# Altium PCB STM32_PCB.PcbDoc (part 3 of 3)
Units mm, origin at the board's own origin, x right, y up, seen from the top; angles counter-clockwise.
Board outline 112.45 x 84.2 mm, 4 copper layers (Top Layer, Int1 (GND), Int2 (PWR), Bottom Layer), stack 1.479 mm thick; 174 components, 200 nets, 660 pads, 398 vias.
Unrouted connection lines stored in the file: 12.
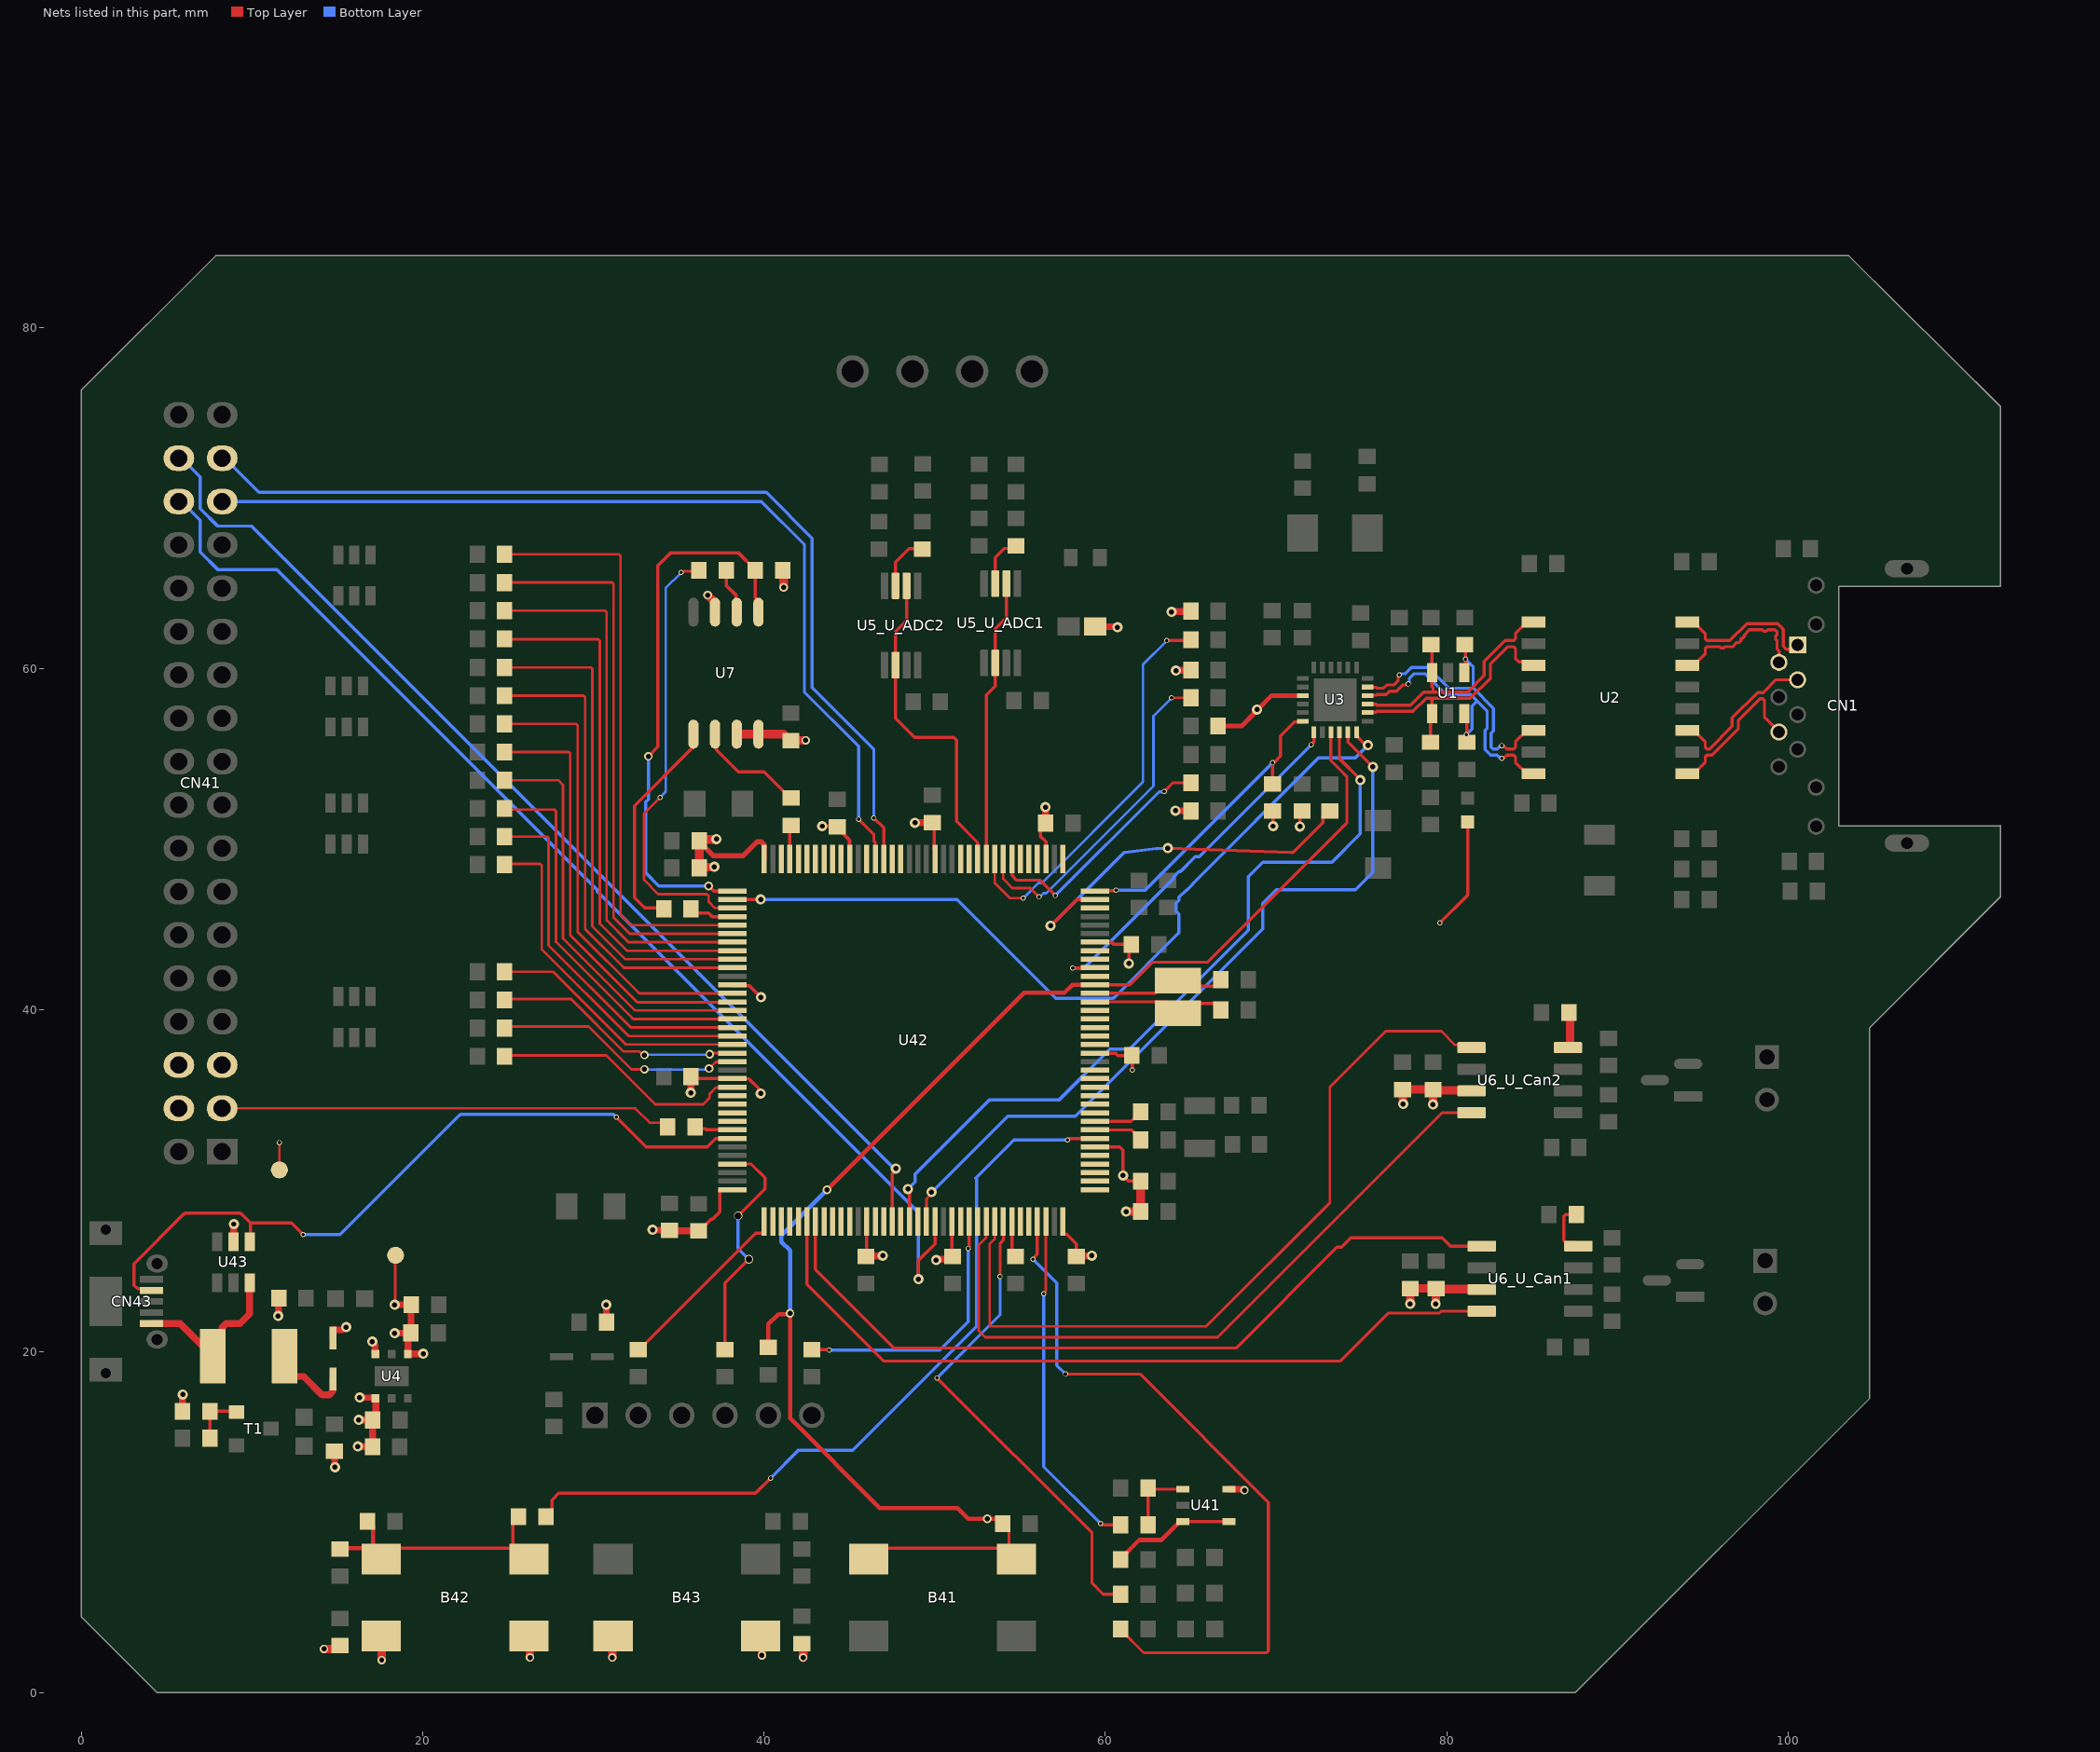
[diagram p5: the nets of this part, all layers, seen from the top]

## Via types
v1: diameter 0.6, hole 0.3, Top Layer to Bottom Layer, 270 vias
v2: diameter 0.3, hole 0.2, Top Layer to Bottom Layer, 77 vias
v3: diameter 0.5, hole 0.3, Top Layer to Bottom Layer, 39 vias
v4: diameter 6.5, hole 3.5, Top Layer to Bottom Layer, 4 vias
v5: diameter 0.5, hole 0.4, Top Layer to Bottom Layer, 4 vias
v6: diameter 0.4, hole 0.2, Top Layer to Bottom Layer, 2 vias
v7: diameter 0.66, hole 0.33, Top Layer to Bottom Layer, 2 vias

## Nets (pads, with @x,y where several pads share a name; then routed paths per layer and width w, separated by ;. In a path a pad name is that pad's centre, name@x,y a point inside that pad or via, vN(x,y) a via of type N, cw(c..) or ccw(c..) an arc to the next point about the centre after c; other vN are vias at no path point) (continued)
NetR25_2: R25.2 R26.2 T1.1 | length 3.2
  Top Layer w0.19: R26.2@7.531,14.91 R25.2@7.531,16.485 9.073,16.485 T1.1@9.109,16.449
NetR28_U_ADC1_2: R28_U_ADC1.2 U5_U_ADC1.3 | length 3
  Top Layer w0.18: U5_U_ADC1.3@53.548,64.987 53.548,66.502 54.098,67.052 54.618,67.052 R28_U_ADC1.2@54.762,67.196
NetR28_U_ADC2_2: R28_U_ADC2.2 U5_U_ADC2.3 | length 3.3
  Top Layer w0.18: U5_U_ADC2.3@47.706,64.86 47.706,66.248 48.484,67.026 49.268,67.026 R28_U_ADC2.2@49.276,67.018
NetR31_U_Can1_1: R31_U_Can1.1 U6_U_Can1.8 | length 3.2
  Top Layer w0.19: R31_U_Can1.1@87.592,28.016 86.968,28.016 86.857,27.905 86.857,26.503 86.968,26.392 87.476,26.392 U6_U_Can1.8@87.706,26.162
NetR31_U_Can2_1: R31_U_Can2.1 U6_U_Can2.8 | length 2.2
  Top Layer w0.5: U6_U_Can2.8@87.102,37.795 87.177,37.87 87.224,37.87 87.224,39.789 R31_U_Can2.1@87.16,39.853
NetR47_1: R47.1 R48.1 U41.1 | length 4.2
  Top Layer w0.18: R48.1@62.497,9.83 R47.1@62.497,11.989 62.563,11.923 U41.1@64.538,11.923
NetR49_1: R49.1 U41.3 U41.4 | length 7.3
  Top Layer w0.18: U41.3@64.538,10.023 U41.4@67.238,10.023
  Top Layer w0.254: R49.1@60.897,7.798 60.897,7.848 61.998,8.949 63.286,8.949 64.36,10.023 U41.3@64.538,10.023
NetR66_2: R66.2 U42.7 | length 46.9
  Top Layer w0.19: R66.2@27.216,10.312 27.571,10.667 27.571,11.289 27.966,11.684 39.497,11.684 v2(40.386,12.573) ; v2(57.785,32.385) 57.815,32.385 57.906,32.476 U42.7@59.393,32.477 U42.7@59.393,32.477
  Bottom Layer w0.19: v2(40.386,12.573) 42.01,14.197 45.185,14.197 52.456,21.468 52.456,30.094 52.403,30.147 54.64,32.385 v2(57.785,32.385)
NetR74_1: R74.1 U42.138 | length 2.1
  Top Layer w0.19: U42.138@54.518,27.602 54.518,25.784 R74.1@54.737,25.565
nRST: B41.2 B41.3 C43.2 R45.2 U3.15 U42.25 | length 89.7
  Top Layer w0.175: U42.25@59.393,41.477 61.439,41.477 62.771,42.809 65.999,42.809 74.143,50.952 74.143,53.693 73.793,54.043 73.212,54.624 U3.15@73.212,56.278
  Top Layer w0.18: C43.2@53.988,9.906 54.348,9.546 54.348,8.278 B41.3@54.465,8.162 ; B41.3@54.795,7.831 B41.3@54.465,8.162 ; B41.2@46.78,8.466 B41.2@46.145,7.831 B41.2@46.78,8.466 ; B41.2@46.78,8.466 54.16,8.466 B41.3@54.465,8.162
  Top Layer w0.254: R45.2@40.259,20.231 40.259,21.59 40.847,22.178 41.482,22.178 v3(41.529,22.225) 41.529,16.074 46.782,10.82 51.332,10.82 51.967,10.185 v3(53.086,10.185) 53.708,10.185 C43.2@53.988,9.906 ; v3(43.688,29.464) 55.232,41.008 57.601,41.008 58.07,41.477 U42.25@59.393,41.477
  Bottom Layer w0.254: v3(41.529,22.225) 41.529,25.908 41.021,26.416 41.021,26.797 v3(43.688,29.464)
P3V3: B42.2 B42.3 B43.2 B43.3 C4.2 C14.1 C16.2 C20_U_Can1.2 C20_U_Can2.2 C21_U_Can1.2 C21_U_Can2.2 C22.2 C48.1 C49.1 C50.1 C51.1 C54.1 C56.1 C57.1 C58.1 C59.1 C60.1 C62.1 C63.1 C64.1 C65.1 C66.1 CN41.5 CN41.6 FB41.1 L1.2 pad.2@18.415,25.629 R3.1 R4.1 R5.1 R17.2 R18.1 R23.2 R33.2 R42.2 R75.1 R77.1 U3.9 U4.4 U6_U_Can1.3 U6_U_Can2.3 U7.3 U7.7 U7.8 U41.5 U42.6 U42.17 U42.30 U42.39 U42.52 U42.62 U42.72 U42.84 U42.95 U42.108 U42.121 U42.131 U42.144 | length 111
  Top Layer w0.15: v1(18.364,22.733) 18.39,22.758 18.39,25.603 pad.2@18.415,25.629
  Top Layer w0.19: C57.1@35.725,36.093 35.841,35.977 U42.95@38.143,35.977 U42.95@38.143,35.977 39.113,35.976 39.723,35.365 39.723,35.181 v1(39.802,35.103) ; C50.1@45.974,25.565 45.993,25.584 46.018,25.609 U42.121@46.018,27.602 ; C49.1@51.016,25.527 C49.1@51.054,25.565 51.018,25.601 U42.131@51.018,27.602 ; C65.1@56.502,50.952 56.185,50.635 56.185,50.19 56.519,49.856 56.519,48.853 U42.39@56.518,48.852 ; U42.144@57.573,28.194 57.518,28.139 U42.144@57.518,27.602 57.518,26.927 57.573,26.872 57.721,26.872 58.293,26.3 C48.1@58.293,25.565 ; U42.6@59.393,31.977 U42.6@59.393,31.977 60.836,31.976 61.036,31.775 v1(61.036,30.302) 61.366,29.972 C60.1@62.065,29.972 ; U42.17@59.393,37.477 59.394,37.476 60.593,37.476 60.732,37.338 C59.1@61.557,37.338 61.57,37.325 v2(61.57,36.474) ; U42.30@59.393,43.977 59.394,43.976 60.363,43.976 60.498,43.84 61.443,43.84 C66.1@61.532,43.84 61.383,43.435 v1(61.383,42.728) ; R17.2@69.799,51.651 69.825,51.626 v1(69.825,50.775) ; v1(71.399,50.749) 71.399,51.524 R18.1@71.526,51.651 ; v2(79.604,45.11) 81.229,46.736 L1.2@81.229,51.016
  Top Layer w0.195: C56.1@36.17,27.051 36.22,27.051 36.908,27.739 36.984,27.739 37.416,28.171 37.416,29.425 37.468,29.477 U42.108@38.143,29.477
  Top Layer w0.2: U42.84@38.143,41.477 38.193,41.427 39.142,41.427 v1(39.827,40.742) ; v1(43.409,50.775) 44.26,50.775 C63.1@44.298,50.737 ; C63.1@44.313,50.756 44.584,50.387 44.959,50.011 cw(c44.818,49.87) 45.018,49.87 U42.62@45.018,48.852 ; C64.1@49.86,50.991 49.968,50.641 49.968,49.577 U42.52@50.018,48.852
  Top Layer w0.28: C4.2@66.605,56.642 67.985,56.642 68.885,57.541 v1(68.885,57.607) 68.922,57.607 69.743,58.428 U3.9@71.562,58.428
  Top Layer w0.3: C62.1@36.204,49.866 37.023,49.047 38.786,49.047 39.594,49.855 39.842,49.855 40.018,49.68 U42.72@40.018,48.852
  Top Layer w0.4: R23.2@14.834,14.135 14.846,14.122 14.846,13.221 v1(14.859,13.208) ; v1(18.364,21.057) 18.731,21.065 cw(c18.741,20.666) 18.741,21.066 19.059,21.066 19.141,20.906 19.141,19.846 U4.4@19.136,19.842 19.147,19.852 20.03,19.852 v1(20.041,19.863) ; v1(18.364,22.733) 19.084,22.733 19.322,22.72 19.322,21.087 C16.2@19.309,21.075 ; v1(30.759,22.733) 30.766,22.727 30.766,21.723 R42.2@30.772,21.717 ; v1(33.477,27.127) 33.502,27.102 34.438,27.102 34.476,27.064 36.157,27.064 C56.1@36.17,27.051 ; v1(35.712,35.154) 35.719,35.16 35.719,36.087 C57.1@35.725,36.093 ; C50.1@45.993,25.584 46.945,25.584 v1(46.965,25.603) ; v1(48.844,50.978) 48.851,50.984 49.854,50.984 C64.1@49.86,50.991 ; v1(50.089,25.349) 50.127,25.387 50.876,25.387 C49.1@51.016,25.527 ; v1(56.49,51.892) 56.496,51.886 56.496,50.959 C65.1@56.502,50.952 ; C48.1@58.293,25.565 58.312,25.584 59.188,25.584 v1(59.207,25.603) ; FB41.1@59.399,62.484 59.425,62.459 60.681,62.459 v1(60.706,62.433) ; v1(63.881,63.322) 63.906,63.348 64.98,63.348 R4.1@65.005,63.373 ; v1(64.11,51.689) 64.123,51.676 64.992,51.676 R5.1@65.005,51.662 ; v1(64.135,59.893) 64.147,59.905 64.993,59.905 R3.1@65.005,59.917 ; U41.5@67.238,11.923 68.06,11.923 68.121,11.862 v3(68.148,11.862)
  Top Layer w0.5: v3(14.224,2.565) 14.973,2.565 R75.1@15.164,2.756 ; B42.3@17.57,3.331 17.602,3.299 v3(17.602,1.905) ; B42.2@26.22,3.331 26.289,3.262 v3(26.289,2.057) ; v3(31.115,2.057) 31.115,3.288 B43.3@31.159,3.331 ; v3(36.703,64.313) 37.135,63.881 U7.3@37.135,63.316 ; v1(37.084,48.387) 37.065,48.368 36.239,48.368 C54.1@36.208,48.336 36.206,48.338 36.206,49.915 C62.1@36.204,49.916 36.287,49.999 37.189,49.999 v1(37.208,50.018) ; U7.7@38.405,56.166 U7.8@39.675,56.166 41.155,56.166 41.53,55.791 C22.2@41.58,55.791 41.592,55.804 v3(42.443,55.804) ; R33.2@41.084,65.761 41.148,65.697 v3(41.148,64.77) ; v1(61.214,28.194) C58.1@62.065,28.194 C60.1@62.065,29.972 ; v1(77.445,34.493) 77.432,34.506 77.432,35.331 C21_U_Can2.2@77.419,35.344 C20_U_Can2.2@79.197,35.344 79.242,35.3 81.408,35.3 U6_U_Can2.3@81.452,35.255 ; C21_U_Can1.2@77.828,23.68 C20_U_Can1.2@79.381,23.68 79.366,23.664 79.366,22.8 v1(79.35,22.784) ; v1(77.851,22.784) 77.854,22.787 77.854,23.627 C21_U_Can1.2@77.907,23.68 ; v1(79.197,34.468) 79.197,35.144 C20_U_Can2.2@79.301,35.3 ; C20_U_Can1.2@79.411,23.651 82.027,23.651 U6_U_Can1.3@82.056,23.622
  Top Layer w0.508: B43.2@39.809,3.331 39.878,3.262 v3(39.878,2.184) ; R77.1@42.215,2.883 42.291,2.807 v3(42.291,2.057)
PA0: U42.34
PA1: R19.2 U42.35 | length 22.6
  Top Layer w0.19: v1(56.794,44.933) 58.338,46.476 U42.35@59.393,46.477 U42.35@59.393,46.477 ; v1(63.652,49.479) 70.905,49.229 cw(c70.898,49.039) 70.907,49.229 ccw(c70.916,49.418) 71.05,49.284 72.747,50.981 72.747,51.296 73.102,51.651 R19.2@73.152,51.651
  Bottom Layer w0.19: v1(56.794,44.933) 61.04,49.178 cw(c61.175,49.044) 61.061,49.196 cw(c61.175,49.044) 61.151,49.233 62.972,49.463 ; 62.973,49.463 cw(c62.996,49.275) 62.992,49.465 v1(63.652,49.479)
PA2: R17.1 U3.12 U42.36 | length 18.2
  Top Layer w0.19: U42.36@59.393,46.977 59.412,46.996 60.611,46.996 v2(60.63,47.015) ; R17.1@69.799,53.251 v2(69.799,54.488) 69.829,54.488 69.884,54.543 69.922,54.543 70.256,54.877 70.256,56.058 71.082,56.883 71.517,56.883 U3.12@71.562,56.928
  Bottom Layer w0.19: v2(60.63,47.015) 62.326,47.015 v2(69.799,54.488)
PA3: U42.37
PA4: U42.40
PA5: U42.41
PA6: U42.42
PA7: R16.2 U42.43 | length 14.7
  Top Layer w0.175: U42.43@54.518,48.852 54.526,48.844 54.526,47.886 54.812,47.6 56.185,47.6 v2(57.074,46.711) ; v2(63.449,52.807) 63.956,53.313 R16.2@65.005,53.313
  Bottom Layer w0.175: v2(57.074,46.711) 63.146,52.783 63.425,52.783 v2(63.449,52.807)
PA8: U42.100
PA9: R52.2 U42.101 | length 2.3
  Top Layer w0.19: R52.2@35.954,33.147 36.069,33.031 36.577,33.031 36.631,32.978 U42.101@38.143,32.977 U42.101@38.143,32.977
PA10: CN43.4 U42.102 U43.4 | length 44.2
  Top Layer w0.19: CN43.4@4.12,23.571 3.641,23.571 3.54,23.672 3.3,23.672 3.096,23.876 3.096,25.133 6,28.037 cw(c6.134,27.902) 6.02,28.054 cw(c6.134,27.902) 6.134,28.092 9.264,28.092 cw(c9.264,27.902) 9.398,28.037 9.906,27.529 ; U43.4@9.865,26.422 9.906,26.463 9.906,27.529 ; v2(13.005,26.848) 12.324,27.529 9.906,27.529 ; v2(31.344,33.731) 33.096,31.979 36.676,31.979 37.173,32.476 U42.102@38.143,32.477 U42.102@38.143,32.477
  Bottom Layer w0.19: v2(13.005,26.848) 15.164,26.848 22.144,33.828 cw(c22.278,33.694) 22.164,33.846 cw(c22.278,33.694) 22.278,33.884 31.113,33.884 cw(c31.113,33.694) 31.246,33.828 v2(31.344,33.731)
PA13: R44.2 U42.105 | length 13.8
  Top Layer w0.18: R44.2@37.719,20.104 37.719,24.003 v5(39.116,25.4) ; U42.105@38.143,30.977 39.254,30.977 40.056,30.175 40.056,29.515 v5(38.481,27.94)
  Bottom Layer w0.18: v5(38.481,27.94) 38.481,26.035 v5(39.116,25.4)
PA14: R43.2 U42.109 | length 10.2
  Top Layer w0.19: R43.2@32.639,20.104 32.689,20.104 39.512,26.927 U42.109@40.018,26.927
PA15: U42.110
PB0: U5_U_ADC1.2 U5_U_ADC1.6 U42.46 | length 16.6
  Top Layer w0.18: U42.46@53.018,48.852 53.024,48.858 53.024,58.46 53.548,58.984 U5_U_ADC1.6@53.548,60.337 53.548,62.337 54.198,62.987 U5_U_ADC1.2@54.198,64.987
PB1: U5_U_ADC2.2 U5_U_ADC2.6 U42.47 | length 19.6
  Top Layer w0.18: U5_U_ADC2.2@48.356,64.86 48.356,62.819 47.706,62.169 U5_U_ADC2.6@47.706,60.21 47.706,57.094 48.823,55.978 51.109,55.978 51.279,55.807 51.279,51.052 52.512,49.819 52.512,48.858 U42.47@52.518,48.852
PB2: U42.48
PB3: R46.2 U42.133 | length 15.8
  Top Layer w0.19: R46.2@42.799,20.104 43.747,20.104 43.785,20.066 v2(43.815,20.066) ; v2(51.957,26.036) 51.957,26.066 52.017,26.125 52.017,27.601 U42.133@52.018,27.602
  Bottom Layer w0.19: v2(43.815,20.066) 50.292,20.066 51.957,21.731 v2(51.957,26.036)
PB4: U42.134
PB5: U6_U_Can2.4 U42.135 | length 41.1
  Top Layer w0.15: U42.135@53.018,27.602 52.997,27.581 52.997,26.641 52.578,26.222 52.578,21.209 52.959,20.828 66.573,20.828 79.731,33.985 U6_U_Can2.4@81.452,33.985
PB6: U6_U_Can2.1 U42.136 | length 46
  Top Layer w0.15: U42.136@53.518,27.602 53.518,26.594 53.401,26.477 53.401,26.473 53.213,26.285 53.213,21.551 53.301,21.463 65.913,21.463 73.152,28.702 73.152,35.484 76.429,38.76 79.68,38.76 80.49,37.95 81.297,37.95 U6_U_Can2.1@81.452,37.795
PB7: R53.1 U42.137 | length 28.5
  Top Layer w0.175: v2(50.137,18.443) 59.218,9.362 59.218,6.416 59.868,5.766 R53.1@60.897,5.766 ; v2(53.833,24.384) 53.842,24.393 53.842,26.329 54.018,26.505 U42.137@54.018,27.602
  Bottom Layer w0.175: v2(50.137,18.443) 53.833,22.139 v2(53.833,24.384)
PB8: U42.139
PB9: U42.140
PB10: R55.1 U42.69 | length 2
  Top Layer w0.19: U42.69@41.518,48.852 41.518,50.751 R55.1@41.587,50.82
PB11: U42.70
PB12: R33.1 U7.1 U42.73 | length 32.8
  Top Layer w0.19: v3(33.223,54.864) 33.782,55.423 33.782,66.04 34.519,66.777 38.518,66.777 39.484,65.811 R33.1@39.484,65.761 39.484,64.167 39.675,63.977 U7.1@39.675,63.316 ; v3(36.754,47.269) 37.046,46.977 U42.73@38.143,46.977
  Bottom Layer w0.19: v3(33.223,54.864) 33.223,52.344 33.081,52.202 33.081,48.021 33.833,47.269 v3(36.754,47.269)
PB13: U3.18 U42.74 | length 48.3
  Top Layer w0.19: U42.74@38.143,46.477 38.145,46.48 39.799,46.48 v1(39.802,46.482) ; U3.18@74.712,56.278 74.712,56.073 75.18,55.604 75.307,55.604 v1(75.387,55.524)
  Bottom Layer w0.19: v1(39.802,46.482) 51.308,46.482 57.099,40.691 60.399,40.691 ccw(c60.399,40.881) 60.513,40.729 ccw(c60.399,40.881) 60.533,40.746 64.258,44.471 ccw(c64.123,44.605) 64.275,44.491 ccw(c64.123,44.605) 64.313,44.605 64.313,45.635 64.149,45.799 64.149,46.251 64.313,46.415 64.313,46.609 64.733,47.029 64.767,47.029 65.086,47.348 65.086,47.383 72.466,54.762 74.625,54.762 v1(75.387,55.524)
PB14: R34.1 U42.75 | length 26.1
  Top Layer w0.15: v2(33.909,52.451) 32.969,51.511 32.969,47.625 33.8,46.794 36.666,46.794 36.754,46.707 36.754,46.342 37.119,45.977 U42.75@38.143,45.977 ; v2(35.154,65.634) 35.194,65.634 35.271,65.711 36.132,65.711 R34.1@36.182,65.761
  Bottom Layer w0.15: v2(33.909,52.451) 34.239,52.781 34.239,64.719 v2(35.154,65.634)
PB15: R60.1 U42.76 | length 2.6
  Top Layer w0.19: R60.1@35.725,45.923 35.965,45.683 36.755,45.683 36.961,45.477 U42.76@38.143,45.477
PC0: U42.26
PC1: U3.13 U42.27 | length 21.5
  Top Layer w0.19: v2(58.09,42.469) 58.094,42.473 59.389,42.473 U42.27@59.393,42.477 ; v2(72.06,55.55) 72.06,55.56 72.212,55.712 U3.13@72.212,56.278
  Bottom Layer w0.19: v2(58.09,42.469) 58.75,42.469 63.996,47.715 63.996,47.8 64.316,48.119 64.401,48.119 65.267,48.986 65.496,48.986 v2(72.06,55.55)
PC2: U42.28
PC3: U42.29
PC4: R8.2 U42.44 | length 19.8
  Top Layer w0.15: U42.44@54.018,48.852 54.018,47.684 54.554,47.148 55.595,47.148 v2(56.116,46.627) ; v2(63.881,58.293) R8.2@65.005,58.293
  Bottom Layer w0.15: v2(56.116,46.627) 56.157,46.627 56.377,46.847 56.533,46.847 62.814,53.128 62.814,57.226 v2(63.881,58.293)
PC5: R9.2 U42.45 | length 23.6
  Top Layer w0.15: U42.45@53.518,48.852 53.518,47.453 54.413,46.558 v2(55.194,46.558)
  Top Layer w0.184: v2(63.602,61.646) 64.956,61.646 R9.2@65.005,61.695
  Bottom Layer w0.15: v2(55.194,46.558) 56.083,47.447 56.286,47.447 62.205,53.365 62.205,60.249 v2(63.602,61.646)
PC6: R70.2 U42.96 | length 15.1
  Top Layer w0.15: R70.2@24.803,37.338 30.759,37.338 33.62,34.477 36.438,34.477 36.81,34.849 36.81,35.084 37.182,35.456 38.122,35.456 U42.96@38.143,35.477
PC7: U42.97
PC8: U42.98
PC9: U42.99
PC10: U42.111
PC11: U42.112
PC12: U42.113
PC14: R72.2 U42.8 | length 2.9
  Top Layer w0.18: U42.8@59.393,32.977 61.523,32.977 62.065,32.435 R72.2@62.065,32.385
PC15: R71.2 U42.9 | length 2.9
  Top Layer w0.18: U42.9@59.393,33.477 59.399,33.471 61.5,33.471 61.655,33.626 61.705,33.626 62.065,33.986 R71.2@62.065,34.036
PD0: U6_U_Can1.4 U42.114 | length 46.3
  Top Layer w0.18: U42.114@42.518,27.602 42.512,27.596 42.512,23.909 46.99,19.431 73.787,19.431 76.6,22.244 79.573,22.244 79.681,22.352 U6_U_Can1.4@82.056,22.352
PD1: U6_U_Can1.1 U42.115 | length 46.6
  Top Layer w0.18: U42.115@43.018,27.602 43.012,27.596 43.012,24.806 47.625,20.193 67.655,20.193 73.574,26.111 73.837,26.111 74.377,26.651 79.731,26.651 80.22,26.162 U6_U_Can1.1@82.056,26.162
PD2: U42.116
PD3: U42.117
PD4: U42.118
PD5: U42.119
PD6: U42.122
PD7: U42.123
PD8: R51.1 U42.77 | length 34.7
  Top Layer w0.15: R51.1@24.803,66.7 24.828,66.675 24.854,66.7 31.503,66.7 31.59,66.613 31.59,45.6 32.214,44.977 U42.77@38.143,44.977
PD9: R54.1 U42.78 | length 33.3
  Top Layer w0.15: R54.1@24.803,65.049 24.828,65.024 24.854,65.049 31.099,65.049 31.186,64.962 31.186,45.42 32.14,44.466 38.132,44.466 U42.78@38.143,44.477
PD10: R57.1 U42.79 | length 32
  Top Layer w0.15: R57.1@24.803,63.398 24.828,63.373 24.854,63.398 30.695,63.398 30.782,63.311 30.782,45.253 32.058,43.977 U42.79@38.143,43.977
PD11: R58.1 U42.80 | length 30.6
  Top Layer w0.15: R58.1@24.803,61.747 24.828,61.722 30.291,61.722 30.378,61.634 30.378,45.06 31.961,43.477 U42.80@38.143,43.477
PD12: R61.1 U42.81 | length 29.3
  Top Layer w0.15: R61.1@24.803,60.071 29.859,60.071 29.947,59.983 29.947,44.907 31.877,42.977 U42.81@38.143,42.977
PD13: R63.2 U42.82 | length 27.9
  Top Layer w0.15: R63.2@24.803,58.42 29.427,58.42 29.515,58.332 29.515,44.755 31.793,42.477 U42.82@38.143,42.477
PD14: R65.1 U42.85 | length 27
  Top Layer w0.15: R65.1@24.803,56.769 28.995,56.769 29.083,56.681 29.083,44.577 32.642,41.018 ccw(c32.748,41.124) 32.658,41.004 ccw(c32.748,41.124) 32.748,40.974 38.14,40.974 U42.85@38.143,40.977
PD15: R68.2 U42.86 | length 25.7
  Top Layer w0.15: R68.2@24.803,55.118 28.563,55.118 28.651,55.03 28.651,44.374 32.525,40.5 ; 32.526,40.499 ccw(c32.631,40.606) 32.541,40.486 ccw(c32.631,40.606) 32.631,40.456 38.122,40.456 U42.86@38.143,40.477
PE0: R50.2 U42.141 | length 42.8
  Top Layer w0.175: v2(55.753,25.4) 55.753,25.434 56.009,25.69 56.009,27.594 U42.141@56.018,27.602 ; v2(57.658,18.669) 62.03,18.669 69.545,11.154 69.545,2.439 69.443,2.337 62.244,2.337 60.897,3.684 R50.2@60.897,3.734
  Bottom Layer w0.175: v2(55.753,25.4) 57.15,24.003 57.15,19.177 v2(57.658,18.669)
PE1: R48.2 U42.142 | length 20.3
  Top Layer w0.175: v2(56.388,23.368) 56.388,23.402 56.509,23.523 56.509,27.594 U42.142@56.518,27.602 ; v2(59.715,9.906) 59.749,9.906 59.825,9.83 R48.2@60.897,9.83
  Bottom Layer w0.175: v2(56.388,23.368) 56.388,13.233 v2(59.715,9.906)
PE2: U42.1
PE3: U42.2
PE4: U42.3
PE5: U42.4
PE6: U42.5
PE7: CN41.33 U42.58 | length 57
  Top Layer w0.18: v2(46.431,51.257) 47.018,50.67 U42.58@47.018,48.852
  Bottom Layer w0.18: CN41.33@8.255,72.339 8.405,72.339 10.412,70.333 40.132,70.333 42.824,67.64 42.824,58.903 46.431,55.296 v2(46.431,51.257)
PE8: CN41.31 U42.59 | length 55.3
  Top Layer w0.18: v2(45.542,51.181) 46.433,50.29 46.433,49.913 46.512,49.834 46.512,48.858 U42.59@46.518,48.852
  Bottom Layer w0.18: CN41.31@8.255,69.799 39.853,69.799 42.367,67.285 42.367,58.623 45.542,55.448 v2(45.542,51.181)
PE9: U42.60
PE10: U42.63
PE11: U42.64
PE12: U42.65
PE13: U42.66
PE14: U42.67
PE15: U42.68
PF0: U42.10
PF1: U42.11
PF2: U42.12
PF3: U42.13
PF4: U42.14
PF5: U42.15
PF6: U42.18
PF7: U42.19
PF8: U42.20
PF9: U42.21
PF10: U42.22
PF11: U42.49
PG0: U42.56
PG1: U42.57
PG2: R56.2 U42.87 | length 24.2
  Top Layer w0.15: R56.2@24.803,53.467 27.94,53.467 28.219,53.188 28.219,44.196 32.394,40.021 ; 32.395,40.02 ccw(c32.501,40.127) 32.411,40.007 ccw(c32.501,40.127) 32.501,39.977 U42.87@38.143,39.977
PG3: R59.2 U42.88 | length 22.9
  Top Layer w0.15: R59.2@24.803,51.816 24.879,51.74 27.725,51.74 27.813,51.652 27.813,43.993 32.285,39.521 ; 32.285,39.52 ccw(c32.391,39.627) 32.301,39.507 ccw(c32.391,39.627) 32.391,39.477 U42.88@38.143,39.477
PG4: R62.1 U42.89 | length 21.7
  Top Layer w0.15: R62.1@24.803,50.165 27.293,50.165 27.381,50.077 27.381,43.79 32.194,38.977 U42.89@38.143,38.977
PG5: R64.1 U42.90 | length 20.4
  Top Layer w0.15: R64.1@24.803,48.514 24.854,48.565 26.887,48.565 26.975,48.477 26.975,43.561 32.059,38.477 U42.90@38.143,38.477
PG6: R67.2 U42.91 | length 15.1
  Top Layer w0.15: R67.2@24.803,42.24 27.661,42.24 31.924,37.977 36.57,37.977 36.58,37.987 37.06,37.987 37.069,37.977 U42.91@38.143,37.977
PG7: R69.2 U42.92 | length 14.7
  Top Layer w0.15: R69.2@24.803,40.64 28.702,40.64 31.775,37.567 32.697,37.567 32.9,37.363 v3(32.995,37.363) ; v3(36.82,37.408) 36.914,37.408 36.984,37.477 U42.92@38.143,37.477
  Bottom Layer w0.15: v3(32.995,37.363) 33.017,37.386 36.797,37.386 v3(36.82,37.408)
PG8: R73.2 U42.93 | length 15
  Top Layer w0.15: R73.2@24.803,38.938 24.687,38.822 24.687,38.923 24.803,39.039 29.719,39.039 32.232,36.526 v3(32.994,36.526) ; v3(36.781,36.576) 36.802,36.576 37.182,36.956 38.122,36.956 U42.93@38.143,36.977
  Bottom Layer w0.15: v3(32.994,36.526) 33.007,36.512 36.717,36.512 v3(36.781,36.576)
PG9: CN41.34 U42.124 | length 63.5
  Top Layer w0.19: U42.124@47.518,27.602 47.518,30.389 47.727,30.598 v1(47.727,30.709)
  Bottom Layer w0.19: CN41.34@5.715,72.339 5.865,72.339 6.964,71.24 6.964,69.386 7.992,68.358 9.975,68.358 47.625,30.709 v1(47.727,30.709)
PG10: U42.125
PG11: U3.16 U42.126 | length 45.6
  Top Layer w0.182: v1(48.44,29.517) v1@48.518,29.438 ; v1(74.93,53.467) v1@74.93,53.517
  Top Layer w0.19: U42.126@48.518,27.602 v1@48.518,29.438 ; U3.16@73.712,56.278 73.712,54.736 v1@74.93,53.517
  Bottom Layer w0.182: 74.824,50.216 74.93,50.322
  Bottom Layer w0.19: v1(48.44,29.517) 48.845,29.922 48.845,30.379 53.188,34.722 57.277,34.722 60.274,37.719 61.417,37.719 68.364,44.666 68.364,47.816 69.215,48.666 69.545,48.666 72.873,48.666 73.274,48.666 74.824,50.216 ; 74.93,50.322 v1(74.93,53.467)
PG12: U42.127
PG13: U3.17 U42.128 | length 45.2
  Top Layer w0.15: U42.128@49.518,27.602 49.518,28.924 49.809,29.215 v1(49.809,29.337)
  Top Layer w0.19: U3.17@74.212,56.278 74.212,55.709 v1(75.667,54.254)
  Bottom Layer w0.15: v1(49.809,29.337) v1@49.835,29.337
  Bottom Layer w0.19: v1@49.835,29.337 54.28,33.782 58.242,33.782 69.215,44.755 69.215,46.253 70.002,47.041 70.44,47.041 73,47.041 74.651,47.041 75.667,48.057 v1(75.667,54.254)
PG14: CN41.32 U42.129 | length 69.4
  Top Layer w0.19: v1(49.047,24.232) 49.047,25.327 50.017,26.297 U42.129@50.018,27.602 U42.129@50.018,27.602
  Bottom Layer w0.19: CN41.32@5.715,69.799 5.865,69.799 6.964,68.7 6.964,66.846 7.992,65.818 11.437,65.818 30.242,47.013 30.242,46.943 49.047,28.138 v1(49.047,24.232)
PG15: U42.132
PH0: C44.1 U42.23 X42.2 | length 8.1
  Top Layer w0.18: U42.23@59.393,40.477 62.897,40.477 63.602,40.477 X42.2@64.262,39.817 64.831,40.386 66.404,40.386 66.764,40.026 C44.1@66.764,40.005
PH1: C47.1 U42.24 X42.1 | length 8
  Top Layer w0.18: U42.24@59.393,40.977 60.122,40.977 60.128,40.983 62.928,40.983 63.662,41.717 X42.1@64.262,41.717 64.577,41.402 66.404,41.402 66.764,41.762 C47.1@66.764,41.783
RD_N: R1.1 U1.6 U2.8 U3.22 | length 18.2
  Top Layer w0.182: U3.22@75.362,58.428 75.377,58.443 75.85,58.443 75.903,58.496 76.454,58.496 76.638,58.681 77.048,58.681 77.412,59.045 77.689,59.045 v2(77.749,59.106) ; v2(83.236,54.741) 83.322,54.741 83.517,54.936 83.924,54.936 84.031,54.83 84.031,54.513 84.696,53.848 U2.8@85.076,53.848
  Top Layer w0.184: U1.6@81.036,57.372 81.178,57.23 R1.1@81.178,56.134
  Bottom Layer w0.182: v2(77.749,59.106) 77.81,59.167 77.81,59.443 78.068,59.701 78.747,59.701 79.952,58.496 81.4,58.496 81.784,58.111 ; v2(81.153,56.134) 81.48,56.461 81.48,57.807 81.784,58.111 ; v2(83.236,54.741) 83.15,54.741 82.954,54.936 82.563,54.936 82.244,55.256 82.244,56.377 82.365,56.498 82.365,57.531 81.784,58.111
RD_P: R6.1 U1.1 U2.6 U3.23 | length 18.2
  Top Layer w0.182: U3.23@75.362,58.928 75.377,58.913 75.85,58.913 75.903,58.86 76.304,58.86 76.488,59.044 76.897,59.044 77.155,59.302 77.155,59.578 v2(77.216,59.639) ; v2(83.236,55.495) 83.322,55.495 83.517,55.3 83.924,55.3 84.031,55.406 84.031,55.723 84.696,56.388 U2.6@85.076,56.388
  Top Layer w0.184: U1.1@81.036,59.772 81.102,59.838 v2(81.102,60.554) 81.102,61.354 R6.1@81.051,61.405
  Bottom Layer w0.182: v2(77.216,59.639) 77.277,59.7 77.554,59.7 77.917,60.064 78.898,60.064 80.102,58.859 81.55,58.859 ; v2(81.102,60.554) 81.55,60.106 81.55,58.859 ; v2(83.236,55.495) 83.15,55.495 82.954,55.3 82.713,55.3 82.607,55.406 82.607,56.226 82.728,56.348 82.728,57.681 81.55,58.859
RX_N: CN1.6 U2.9 | length 9.1
  Top Layer w0.182: U2.9@94.096,53.848 94.476,53.848 95.141,54.513 95.141,54.83 95.247,54.936 95.548,54.936 97.081,56.469 97.081,56.966 98.357,58.242 98.508,58.242 98.615,58.135 98.615,57.137 CN1.6@99.459,56.292
RX_P: CN1.3 U2.11 | length 9.1
  Top Layer w0.182: U2.11@94.096,56.388 94.476,56.388 95.141,55.723 95.141,55.406 95.247,55.3 95.398,55.3 96.718,56.62 96.718,57.116 98.207,58.605 98.537,58.605 99.285,59.352 CN1.3@100.559,59.352
S_OUT: R34.2 U7.2 | length 2.8
  Top Layer w0.19: R34.2@37.782,65.761 37.782,64.884 38.379,64.288 38.379,63.491 38.48,63.391 U7.2@38.405,63.316
SPI_CLK: R55.2 U7.6 | length 6.5
  Top Layer w0.19: U7.6@37.135,56.166 37.211,56.089 37.211,55.245 38.506,53.95 40.007,53.95 41.537,52.42 R55.2@41.587,52.42
SPI_IN: R60.2 U7.5 | length 13.1
  Top Layer w0.19: R60.2@34.125,45.923 34.074,45.974 33.02,45.974 32.41,46.584 32.41,51.968 35.786,55.344 35.786,55.426 35.879,55.519 35.961,55.519 35.961,56.069 U7.5@35.865,56.166
TD_N: R2.1 U1.4 U2.3 U3.20 | length 15.2
  Top Layer w0.182: U3.20@75.362,57.428 75.377,57.443 75.85,57.443 75.903,57.496 78.025,57.496 78.795,58.267 79.195,58.267 ; U1.4@79.136,57.372 79.136,58.208 79.195,58.267 ; U2.3@85.076,60.198 84.878,60.396 84.232,60.396 84.031,60.597 84.031,61.18 83.924,61.286 83.566,61.286 82.558,60.279 82.558,59.443 81.382,58.267 79.195,58.267
  Top Layer w0.184: R2.1@79.045,55.689 79.045,57.281 U1.4@79.136,57.372
TD_P: R7.1 U1.3 U2.1 U3.21 | length 15.3
  Top Layer w0.182: U3.21@75.362,57.928 75.377,57.913 75.85,57.913 75.903,57.86 77.874,57.86 78.645,58.63 79.195,58.63 ; U1.3@79.136,59.772 79.136,58.95 79.195,58.891 79.195,58.63 ; U2.1@85.076,62.738 84.696,62.738 84.031,62.073 84.031,61.756 83.924,61.65 83.416,61.65 82.195,60.429 82.195,59.594 81.232,58.63 79.195,58.63
  Top Layer w0.2: R7.1@79.07,61.405 79.136,61.339 U1.3@79.136,59.772
TX_N: CN1.2 U2.14 | length 8.6
  Top Layer w0.182: U2.14@94.096,60.198 94.476,60.198 95.141,60.863 95.141,61.18 95.247,61.286 95.992,61.286 96.066,61.212 96.217,61.212 96.291,61.286 96.736,61.286 96.984,61.534 97.125,61.534 97.232,61.641 97.232,61.782 97.335,61.782 97.417,61.865 97.417,61.968 97.728,62.278 98.481,62.278 98.568,62.191 98.719,62.191 98.806,62.278 99.235,62.278 99.346,62.167 99.346,61.976 99.324,61.976 99.267,61.919 99.267,61.746 99.346,61.667 99.346,61.167 99.475,61.038 99.475,60.387 CN1.2@99.459,60.372
TX_P: CN1.1 U2.16 | length 8.8
  Top Layer w0.182: U2.16@94.096,62.738 94.476,62.738 95.141,62.073 95.141,61.756 95.247,61.65 96.586,61.65 97.577,62.641 99.385,62.641 99.709,62.317 99.709,61.317 99.893,61.133 100.3,61.133 CN1.1@100.559,61.392
USB_PWR: C13.1 C15.2 CN41.3 CN41.4 CN43.1 D48.1 D48.2 F41.1 F41.2 pad.2@11.608,30.632 R24.2 R25.1 R52.1 U4.1 U4.6 U43.3 U43.5 | length 54
  Top Layer w0.15: CN41.3@8.255,34.239 32.461,34.239 33.299,33.401 34.1,33.401 R52.1@34.354,33.147 ; pad.2@11.608,30.632 v2(11.608,32.233)
  Top Layer w0.4: CN43.1@4.12,21.621 5.794,21.621 F41.2@7.704,19.71 7.704,20.32 8.254,20.87 8.254,21.387 8.489,21.621 9.302,21.621 9.865,22.184 U43.3@9.865,24.022 ; R25.1@5.931,16.485 5.937,16.491 5.937,17.469 v1(5.944,17.475) ; U43.5@8.915,26.422 8.928,26.435 8.928,27.445 v1(8.941,27.457) ; v1(11.532,22.073) 11.551,22.092 11.551,23.095 R24.2@11.57,23.114 ; F41.1@11.904,19.71 11.904,19.078 12.454,18.528 13.02,18.528 14.102,17.446 14.523,17.446 14.757,17.68 D48.1@14.757,18.383 ; D48.2@14.757,20.783 14.757,21.258 15.311,21.258 15.465,21.412 v1(15.519,21.412) ; v1(16.201,14.428) 16.214,14.415 17.047,14.415 C13.1@17.059,14.402 17.07,14.413 17.07,15.907 C15.2@17.14,15.977 ; v1(16.256,15.977) C15.2@17.082,15.977 17.082,16.097 17.261,16.277 17.261,17.217 U4.1@17.236,17.242 17.211,17.27 v1(16.307,17.297) ; v1(17.043,20.574) 17.043,20.52 17.211,20.352 17.211,19.867 U4.6@17.236,19.842
USR_BTN: B42.1 B42.4 C52.2 R66.1 R76.1 | length 16.6
  Top Layer w0.19: B42.4@17.57,7.831 18.205,8.466 B42.1@25.286,8.466 ; R66.1@25.616,10.312 25.286,9.982 B42.1@25.286,8.466 ; B42.1@26.22,7.831 25.585,8.466 B42.1@25.286,8.466
  Top Layer w0.254: C52.2@15.164,8.42 15.21,8.466 B42.4@17.1,8.466 ; B42.4@17.57,7.831 17.24,8.162 17.1,8.301 B42.4@17.1,8.466 ; R76.1@16.777,10.033 R76.1@17.1,9.71 ; R76.1@16.777,10.033 R76.1@17.1,9.71 ; R76.1@16.777,10.033 R76.1@17.1,9.71 ; B42.4@17.1,8.466 R76.1@17.1,9.71
pads on no net: U2.4 U2.5 U2.12 U2.13 U4.3 U4.5 U5_U_ADC1.1 U5_U_ADC1.5 U5_U_ADC1.8 U5_U_ADC2.1 U5_U_ADC2.5 U5_U_ADC2.8 U42.50 U42.53 U42.54 U42.55

## Polygon pours and split planes (outlines as drawn)
AVDD on Int2 (PWR) "AVDD_L03_P054" (solid, pour order 54): 43.599,54.953 51.867,54.953 cw(c51.867,54.788) 52.032,54.788 52.032,48.476 53.416,48.476 53.416,54.47 58.483,54.47 58.483,83.16 43.599,83.16
P3V3 on Int2 (PWR) "P3V3_L03_P056" (solid, pour order 56): 9.322,83.261 43.269,83.261 43.269,54.788 ccw(c43.434,54.788) 43.434,54.623 51.702,54.623 51.702,48.311 ccw(c51.867,48.311) 51.867,48.146 53.721,48.146 53.721,54.14 58.649,54.14 ccw(c58.649,54.305) 58.814,54.305 58.814,83.261 103.177,83.261 111.633,74.854 111.633,64.821 102.997,64.821 102.972,64.795 102.972,50.8 111.633,50.8 111.633,47.092 104.165,39.624 104.165,18.009 87.071,0.914 5.004,0.914 0.711,5.207 0.711,74.651
USB_PWR on Int2 (PWR) "Int2 (PWR)-USB_PWR" (solid, pour order 49): 3.556,33.376 3.912,33.02 3.962,33.071 9.83,33.071 10.947,31.953 10.947,28.372 8.026,28.372 8.026,26.848 10.947,26.848 10.947,21.844 7.874,21.844 6.212,20.182 5.156,17.763 5.156,15.672 6.782,15.672 6.782,17.551 15.316,17.551 15.662,17.206 15.662,13.894 17.526,13.894 17.526,21.311 16.459,22.377 12.497,22.377 12.497,34.341 11.328,35.509 4.013,35.509 3.556,35.052
GND on Int2 (PWR) "GND_Diff_Data" (solid, pour order 52): 27.813,32.842 42.443,32.842 42.443,28.575 29.235,28.575 29.235,27.356 27.813,27.356
NetC1_2 on Int2 (PWR) "NETC1_2_L03_P050" (solid, pour order 50): 73.381,45.352 73.381,69.266 92.189,69.266 92.189,51.625 87.503,51.625 ccw(c87.503,51.46) 87.338,51.46 87.338,45.352
NetC7_2 on Int2 (PWR) "NETC7_2_L03_P053" (solid, pour order 53): 110.185,44.742 111.811,46.368 111.811,69.266 92.519,69.266 92.519,51.46 cw(c92.354,51.46) 92.354,51.295 87.668,51.295 87.668,44.742
AGND on Int1 (GND) "AGND_L02_P046" (solid, pour order 46): 44.107,55.08 51.714,55.08 cw(c51.714,54.915) 51.88,54.915 51.88,49.263 53.34,49.263 53.34,55.512 58.61,55.512 58.61,83.236 44.107,83.236
GND on Int1 (GND) "GND_L02_P048" (solid, pour order 48): 8.052,83.236 43.777,83.236 43.777,54.915 ccw(c43.942,54.915) 43.942,54.75 51.549,54.75 51.549,48.933 53.797,48.933 53.797,55.181 58.776,55.181 ccw(c58.776,55.347) 58.941,55.347 58.941,83.236 103.149,83.236 111.455,74.93 111.455,64.783 103.302,64.783 ccw(c103.302,64.618) 103.137,64.618 103.137,51.105 ccw(c103.302,51.105) 103.302,50.94 111.76,50.94 111.76,46.761 104.216,39.218 104.216,17.958 86.97,0.711 5.131,0.711 0.367,5.475 0.497,75.681
GND on Bottom Layer "Top Layer-No Net 1" (solid, remove dead copper, pour order 43): 0.406,6.299 0.406,74.397 9.271,83.261 102.588,83.261 111.506,74.394 111.506,46.838 103.937,39.268 103.937,18.11 86.639,0.813 5.893,0.813
GND on Top Layer "GND_L01_P051" (solid, remove dead copper, pour order 51): 1.016,5.08 1.016,75.336 8.738,83.058 103.052,83.058 111.506,74.653 111.506,46.838 104.013,39.345 104.013,17.602 87.173,0.762 5.334,0.762

## Keep-outs
Keep-Out Layer:
  lines w0.1: 0,95.631 0.508,95.123 1.016,94.615
  lines w0.127: 112.471,46.863 112.471,50.825 ; 112.471,50.825 114.96,50.825 114.986,50.8 114.986,64.77 114.935,64.821 102.997,64.821 102.997,50.825 112.471,50.825

## Other copper
Top Layer:
  pour cut-out: 84.226,63.208 94.946,63.208 94.946,53.378 84.226,53.378
Int2 (PWR):
  pour cut-out: 84.379,63.043 94.844,63.043 94.844,53.467 84.303,53.467
  pour cut-out: 115.011,64.904 115.011,50.8 102.779,50.8 102.779,64.904
Int1 (GND):
  pour cut-out: 84.328,63.094 94.869,63.094 94.869,53.442 84.303,53.442 84.303,62.941
Bottom Layer:
  pour cut-out: 84.277,63.144 94.869,63.144 94.869,53.416 84.277,53.416

## Silkscreen, mask and mechanical layers (free items; w line width, h text height)
Top Overlay:
  drawing of 78 lines, arcs and shapes, not listed
  text "GND" at 44.12,82.586 h1
  text "ADC2" at 47.447,82.535 h1
  text "GND" at 51.206,82.51 h1
  text "ADC1" at 54.585,82.51 h1
  text "ADC 1 | 2" at 57.977,79.883 h1.02 r270
  text "ETHERNET" at 101.778,72.771 h1.02
  text "FLASH" at 34.569,67.302 h1.52
  text "CAN 2" at 97.231,40.219 h1.02
  text "TP: P5V" at 12.852,30.313 h1
  text "USB" at 11.938,27.149 h2
  text "TP: P3V3" at 19.329,26.376 h1
  text "CAN 1" at 96.926,19.29 h1.02
  text "SWD" at 35.56,13.479 h1.52
  text "USR_LED" at 58.903,13.185 h1.02
  text "Green" at 67.716,7.149 h1.02
  text "Blue" at 67.793,5.141 h1.02
  text "Red" at 67.793,3.109 h1.02
  text "BOOT" at 33.833,0.83 h1.52
  text "USER" at 19.939,0.804 h1.52
  text "RESET" at 48.565,0.804 h1.52
Mechanical 1:
  lines w0.127: 112.446,64.863 112.446,75.362 103.607,84.201 7.874,84.201 0,76.327 0,4.445 4.445,0 87.528,0 104.775,17.247 104.775,38.964 112.485,46.673 112.485,50.824
  text "Board Egde" at 112.296,46.914 h0.25 r90